# Altium PCB esp32_with_usbc_1st'one.PcbDoc (part 1 of 2)
Units mil, origin at the board's own origin, x right, y up, seen from the top; angles counter-clockwise.
Board outline 2850 x 1000 mil, 4 copper layers (L1, L2, L3, L4), stack 61.583 mil thick; 64 components, 73 nets, 299 pads, 171 vias.
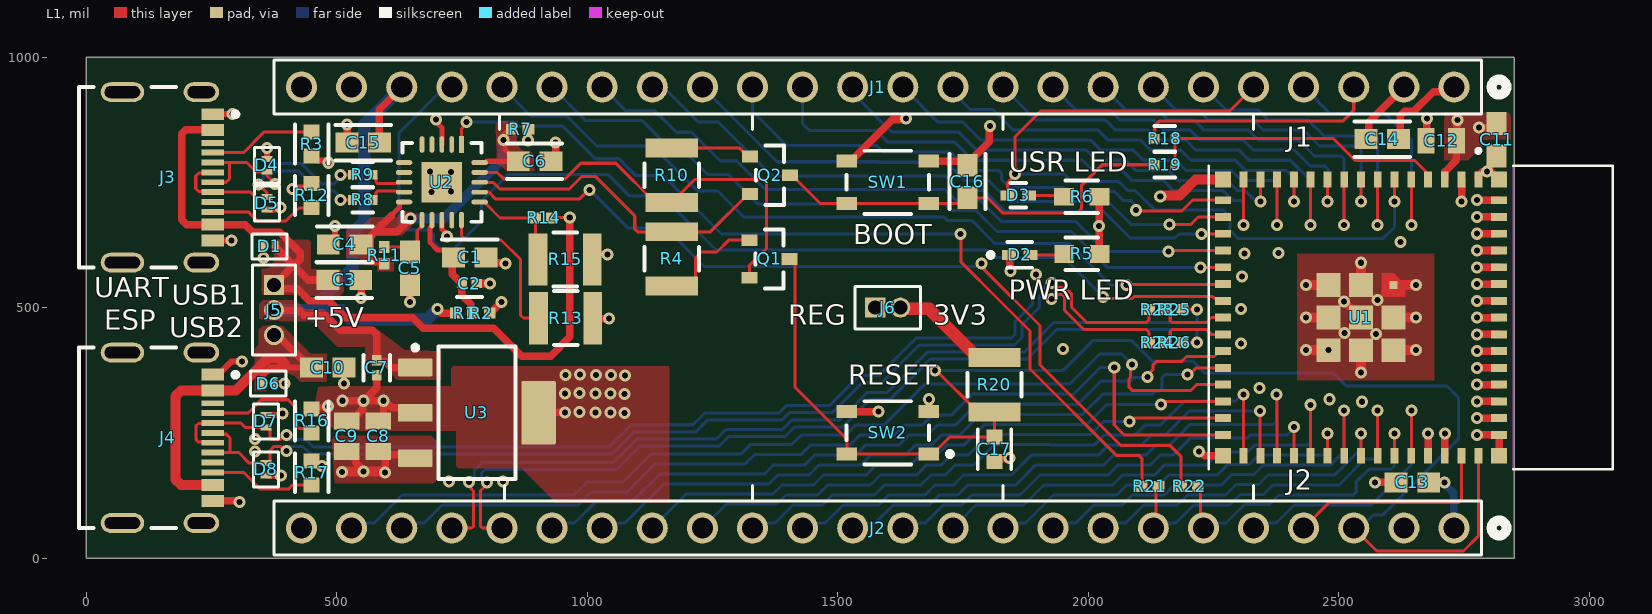
[diagram p0: L1 view]
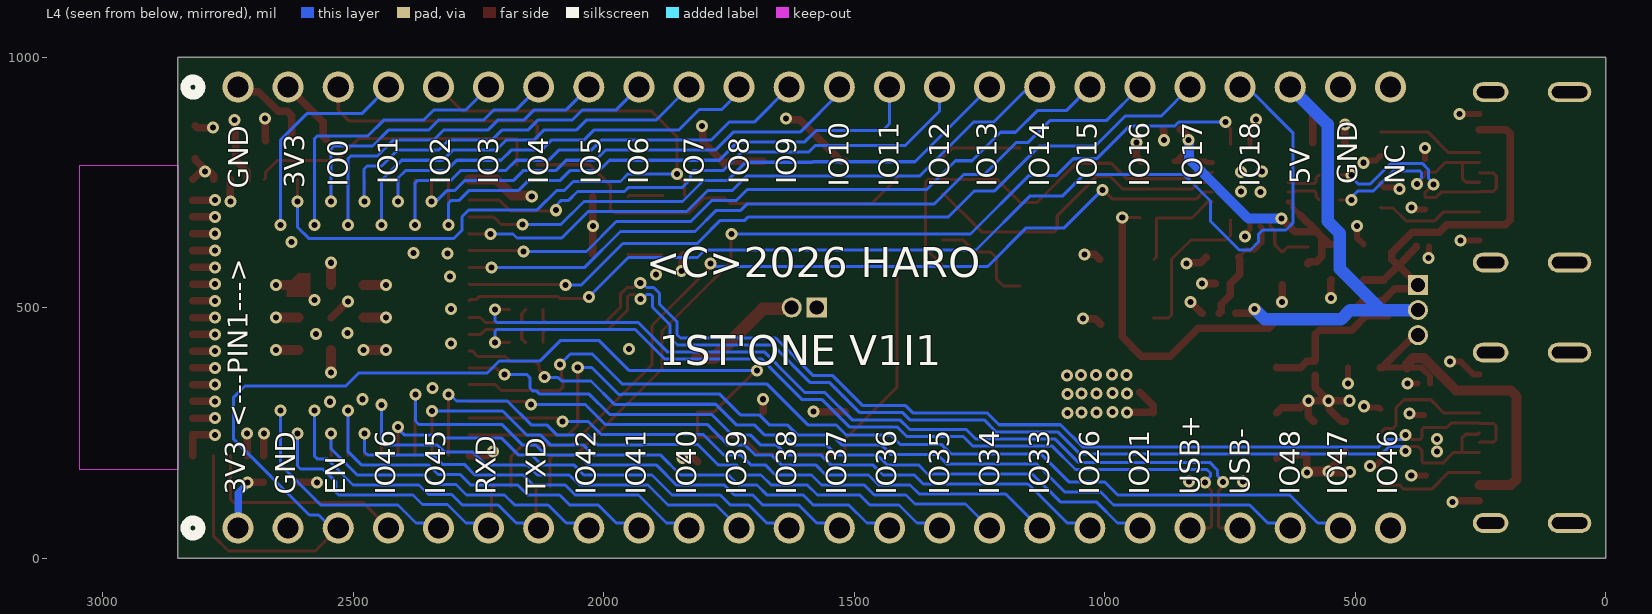
[diagram p1: L4 view, seen from below]
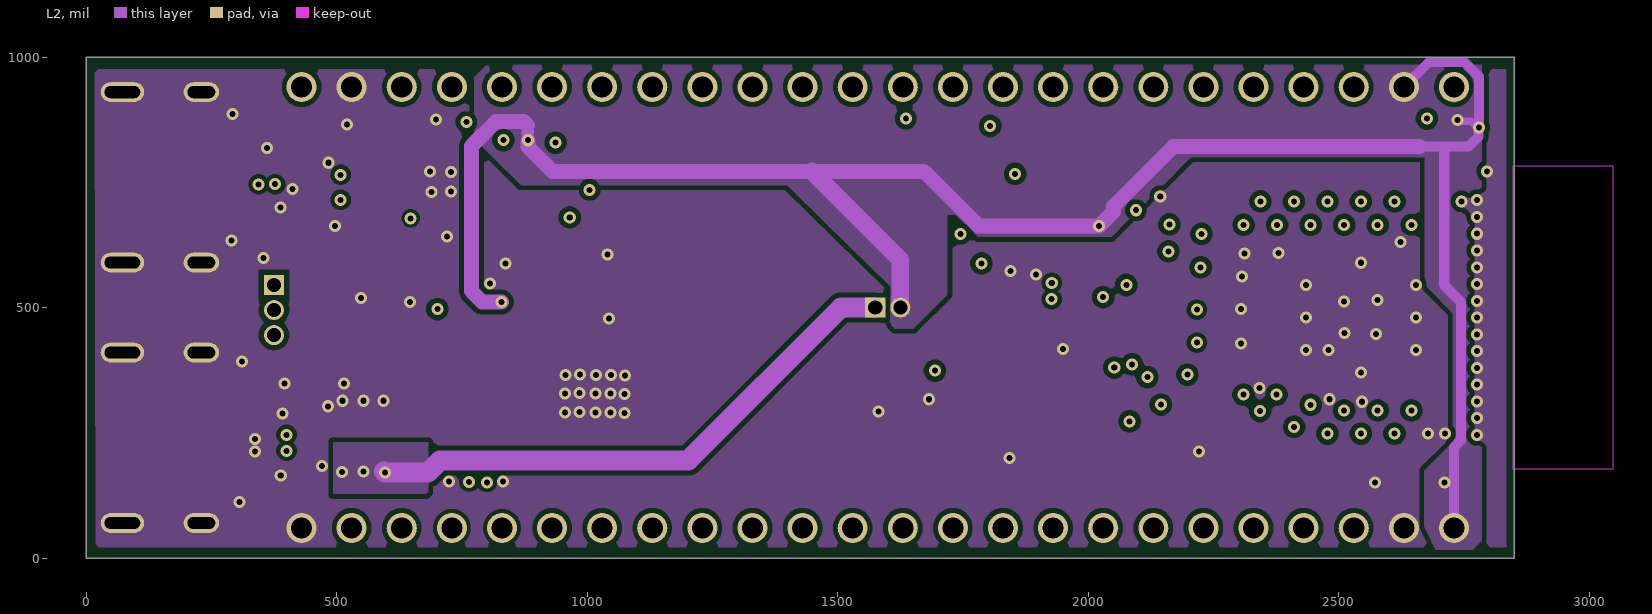
[diagram p2: L2]
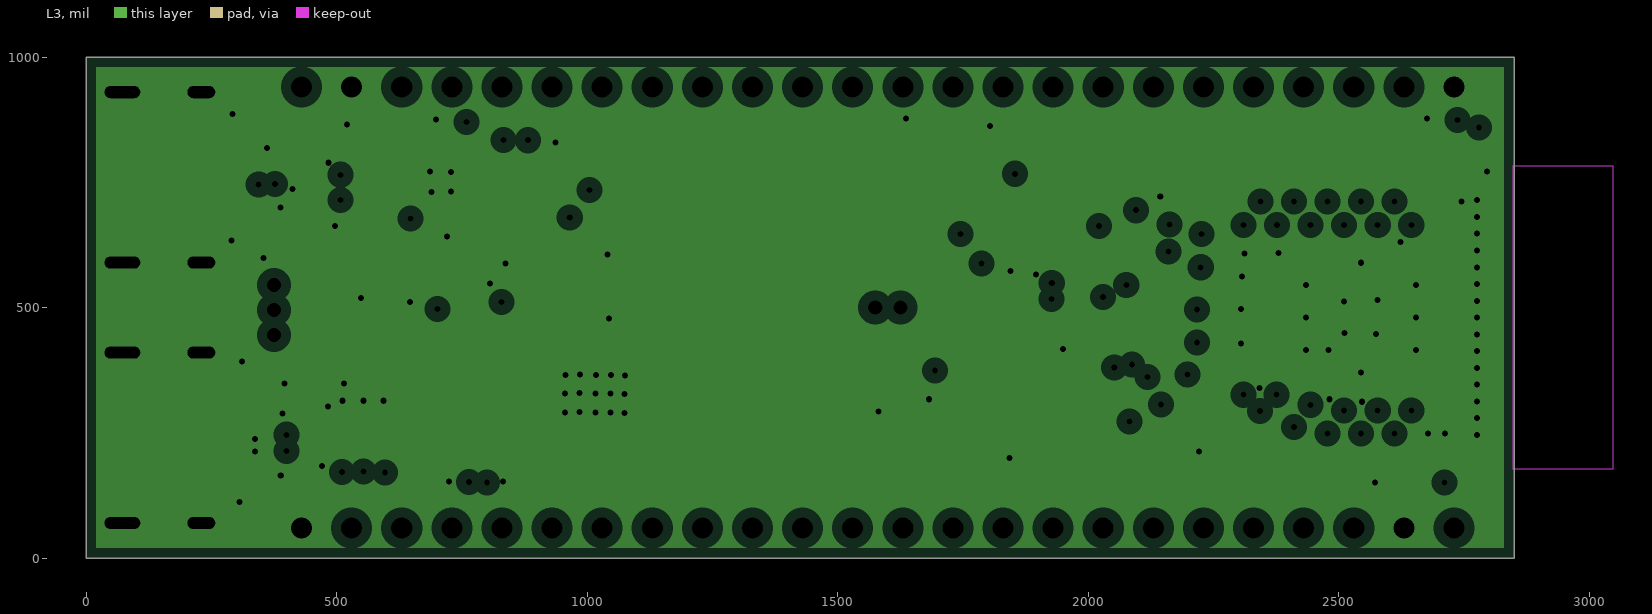
[diagram p3: L3, clearances drawn from the general rule]
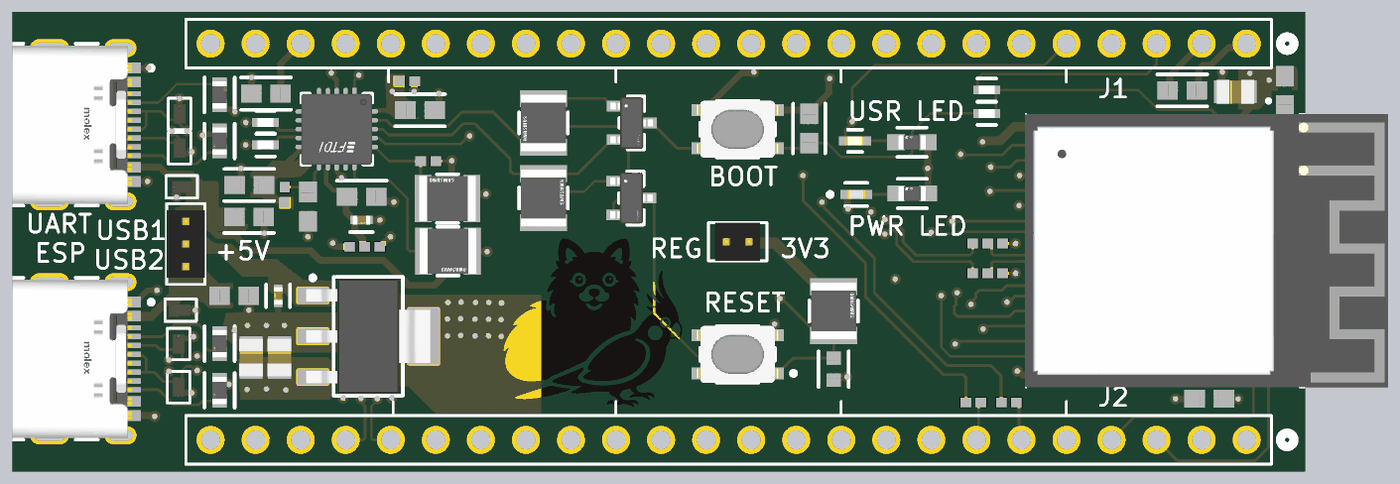
[diagram p5: 3D render of the assembled board from above, using the file's embedded part models]

## Layer stack, top to bottom
Top Solder: solder mask 0.4, Solder Resist, Dk 3.5
L1: signal copper 1.378
Dielectric 2: prepreg 3.9134, PP-006, Dk 4.1
L2: signal copper 0.5984
Dielectric 1: dielectric 49.8031, FR-4, Dk 4.8
L3: plane copper 0.5984, net GND
Dielectric 3: prepreg 3.9134, PP-006, Dk 4.1
L4: signal copper 1.378
Bottom Solder: solder mask 0.4, Solder Resist, Dk 3.5

## Board outline
0,0 2850,0 2850,1000 0,1000

## Design rules (kind name [scope] priority, off if disabled: settings)
Clearance SMALLER [WithinRoom('FTDI') or WithinRoom('USBC2') or WithinRoom('USBC1')] p1: gap=6 ignorepadtopadclearanceinfootprint=FALSE
Clearance "DIFF90 Clearance" [InDifferentialPairClass('DIFF90')] p2: gap=8 ignorepadtopadclearanceinfootprint=FALSE
Clearance [All] p3: gap=10 ignorepadtopadclearanceinfootprint=FALSE except(6: SMDPad-SMDPad)
ComponentClearance R24R26 [InComponent('R24') vs InComponent('R26')] p1: gap=-1 collisioncheckmode=3 verticalgap=-1 showdistances=FALSE
ComponentClearance R23R25 [InComponent('R23') vs InComponent('R25')] p2: gap=-1 collisioncheckmode=3 verticalgap=-1 showdistances=FALSE
ComponentClearance R1R2 [InComponent('R1') vs InComponent('R2')] p3: gap=-1 collisioncheckmode=3 verticalgap=-1 showdistances=FALSE
ComponentClearance [All] p4: gap=10 collisioncheckmode=3 verticalgap=10 showdistances=FALSE
DiffPairsRouting DIFF90 [InDifferentialPairClass('DIFF90')] p1: maxlimit=8.1 minlimit=8 mostfreqgap=8 toplayer_minwidth=6.03 toplayer_maxwidth=6.23 toplayer_prefwidth=6.03 midlayer1_minwidth=5.1 midlayer1_maxwidth=5.2 midlayer1_prefwidth=5.1 bottomlayer_minwidth=6.03 bottomlayer_maxwidth=6.23 bottomlayer_prefwidth=6.03 maxuncoupledlength=500
MinimumSolderMaskSliver [All] p1: minsoldermaskwidth=3.5
PlaneClearance [All] p1: clearance=20
PlaneConnect [All] p1: pad.planeconnectstyle=Relief pad.reliefexpansion=20 pad.reliefentries=4 pad.reliefconductorwidth=20 pad.reliefairgap=10 via.planeconnectstyle=Direct via.reliefexpansion=20 via.reliefentries=4 via.reliefconductorwidth=10 via.reliefairgap=10
PolygonConnect [All] p1: connectstyle=Direct reliefconductorwidth=10 reliefentries=4 polygonreliefangle="90 Angle" airgapwidth=10
RoomDefinition USBC2 [False] p1: confinementstyle=ConfineIn formatcopy=TRUE lockcomponents=FALSE outline 194,384 297,384 297,99 194,99
RoomDefinition USBC1 [False] p2: confinementstyle=ConfineIn formatcopy=TRUE lockcomponents=FALSE outline 188,907 311,907 311,611 188,611
RoomDefinition FTDI [False] p3: confinementstyle=ConfineIn formatcopy=TRUE lockcomponents=FALSE outline 601,864 821,864 821,646 601,646
RoutingVias [All] p1: holewidth=12 width=24 viastyle="Through Hole" minholewidth=12 minwidth=24 maxholewidth=12 maxwidth=24
SilkToSolderMaskClearance [IsPad] p1: minsilkscreentomaskgap=6 clearancetoexposedcopper=TRUE
SolderMaskExpansion [All] p1: expansion=2 istentingtop=FALSE
SupplyNets "Schematic Supply Nets_5" [InNet('+5V')] p1: voltage=0.000
SupplyNets "Schematic Supply Nets_4" [InNet('VCC_3V3')] p2: voltage=0.000
SupplyNets "Schematic Supply Nets_3" [InNet('+5V_VBUS1')] p3: voltage=0.000
SupplyNets "Schematic Supply Nets_2" [InNet('+3V3_REG')] p4: voltage=0.000
SupplyNets "Schematic Supply Nets_1" [InNet('+5V_VBUS2')] p5: voltage=0.000
SupplyNets "Schematic Supply Nets" [InNet('GND')] p6: voltage=0.000
Width [All] p1: maxlimit=100 minlimit=6 preferedwidth=10 minimp=50.000000 maximp=50.000000 favimp=50.000000
24 further rules are at their usual default settings.

## Classes and differential pairs
differential pair class DIFF90: CON1_USB CON2_USB CON_ESP_USB ESP_USB FTDI_USB
net class DIFF90: CON1_USB_N CON1_USB_P CON2_USB_N CON2_USB_P CON_ESP_USB_N CON_ESP_USB_P ESP_USB_N ESP_USB_P FTDI_USB_N FTDI_USB_P
differential pair FTDI_USB: +FTDI_USB_P -FTDI_USB_N
differential pair ESP_USB: +ESP_USB_P -ESP_USB_N
differential pair CON_ESP_USB: +CON_ESP_USB_P -CON_ESP_USB_N
differential pair CON2_USB: +CON2_USB_P -CON2_USB_N
differential pair CON1_USB: +CON1_USB_P -CON1_USB_N

## Components (designator, comment, footprint, x,y, rotation, side; value= is the part's Value field where it differs from the comment)
C1 "100nf 50V" FP-CL10-IPC_A 765.56,600 r0 top
C2 "4.7uF 16V" FP-CL829-IPC_C 764.9,548 r0 top
C3 "100nf 50V" FP-CL10-IPC_A 515.56,555 r0 top
C4 "100nf 50V" FP-CL10-IPC_A 516,626 r180 top
C5 "100nf 50V" FP-CL10-IPC_A 646,578 r270 top
C6 "100nf 50V" FP-CL10-IPC_A 895,792 r0 top
C7 "4.7uF 16V" FP-CL829-IPC_C 580,379.9 r270 top
C8 "CL21B106KAYQNNE" CAP_CL21B106KAYQNNE_SAM-L 583,243 r270 top value=10µF
C9 "CL21B106KAYQNNE" CAP_CL21B106KAYQNNE_SAM-L 520,243 r270 top value=10µF
C10 "100nf 50V" FP-CL10-IPC_A 482.44,380 r0 top
C11 "100nf 50V" FP-CL10-IPC_A 2815,835 r270 top
C12 "CL21B106KAYQNNE" CAP_CL21B106KAYQNNE_SAM-L 2705,833 r0 top value=10µF
C13 "100nf 50V" FP-CL10-IPC_A 2647,151 r180 top
C14 "100nf 50V" FP-CL10-IPC_A 2587,836 r0 top
C15 "100nf 50V" FP-CL10-IPC_A 553,829 r180 top
C16 "100nf 50V" FP-CL10-IPC_A 1759,751.56 r90 top
C17 "1uF/16V(10%)" FP-CL10-IPC_C 1813,217 r270 top
D1 "TVS DIODE 12VC 3A" RTVS_SOD882_LTF 366,622 r0 top
D2 "LED GREEN" FP-SML-LX0402SUGC-TR-MFG 1863.35,605 r0 top
D3 "SML-LX0402SOC-TR" FP-SML-LX0402SOC-TR-MFG 1860.65,724 r0 top
D4 "TVS DIODE 12VC 3A" RTVS_SOD882_LTF 361,784 r270 top
D5 "TVS DIODE 12VC 3A" RTVS_SOD882_LTF 361,708 r90 top
D6 "TVS DIODE 12VC 3A" RTVS_SOD882_LTF 363.5,348 r180 top
D7 "TVS DIODE 12VC 3A" RTVS_SOD882_LTF 359,273 r270 top
D8 "TVS DIODE 12VC 3A" RTVS_SOD882_LTF 359,177 r90 top
J1 "900-0022284245-ND" CONN_SD-42375-001_M295_24_MOL 2730,940 r0 top locked
J2 "900-0022284245-ND" CONN_SD-42375-001_M295_24_MOL 2730,60 r0 top locked
J3 "217179-0001" FP-2171790001-MFG 117.8,759.92 r270 top locked
J4 "217179-0001" FP-2171790001-MFG 117.8,240.08 r270 top locked
J5 "Pin Header, Board-to-Board" HDR_1x3_1.27mm 375,545 r0 top locked
J6 "Samtec FTS-102-01-F-S" HDR_1x2_1.27mm 1575,500 r90 top locked
Q1 "SS8050-G" FP-SS8050-G-MFG 1364,597 r0 top
Q2 "SS8050-G" FP-SS8050-G-MFG 1365,764 r0 top
R1 "jumper 0R" RESC1005X40X25NL05T10 755.27,489 r0 top
R2 "jumper 0R" RESC1005X40X25NL05T10 788.73,489 r180 top
R3 "5.1kΩ, 1%" FP-TFCR0603-IPC_C 450,826.3 r270 top
R4 "10K(1%)" FP-RC3225-IPC_C 1169,597 r90 top
R5 "1KR" FP-CPF0603-MFG 1987.57,607 r0 top value=1.0KΩ
R6 "1KR" FP-CPF0603-MFG 1987,721 r0 top value=1.0KΩ
R7 "jumper 0R" RESC1005X40X25NL05T10 866.27,856 r180 top
R8 "27Ω 0.0625W 1% 100ppm/°" FP-CR0402-MFG 552,715 r0 top
R9 "27Ω 0.0625W 1% 100ppm/°" FP-CR0402-MFG 552,765 r0 top
R10 "10K(1%)" FP-RC3225-IPC_C 1169,764 r270 top
R11 "jumper 0R" RESC1005X40X25NL05T10 595,604.27 r90 top
R12 "5.1kΩ, 1%" FP-TFCR0603-IPC_C 450,723.7 r90 top
R13 "10K(1%)" FP-RC3225-IPC_C 957,479 r0 top
R14 "4.7K" RESC1005X40X25NL05T10 913.28,678.86 r0 top
R15 "10K(1%)" FP-RC3225-IPC_C 956,596 r180 top
R16 "5.1kΩ, 1%" FP-TFCR0603-IPC_C 450,273.7 r90 top
R17 "5.1kΩ, 1%" FP-TFCR0603-IPC_C 450,170 r90 top
R18 "27Ω 0.0625W 1% 100ppm/°" FP-CR0402-MFG 2153,837 r0 top
R19 "27Ω 0.0625W 1% 100ppm/°" FP-CR0402-MFG 2153,785 r0 top
R20 "10K(1%)" FP-RC3225-IPC_C 1813,346 r90 top
R21 "jumper 0R" RESC1005X40X25NL05T10 2123.27,143 r180 top
R22 "jumper 0R" RESC1005X40X25NL05T10 2202,143 r180 top
R23 "jumper 0R" RESC1005X40X25NL05T10 2138.27,496 r0 top
R24 "jumper 0R" RESC1005X40X25NL05T10 2138.27,430 r0 top
R25 "jumper 0R" RESC1005X40X25NL05T10 2171.73,496 r180 top
R26 "jumper 0R" RESC1005X40X25NL05T10 2171.73,430 r180 top
SW1 "SWITCH TACTILE SPST-NO 0.05A 16V" FP-PTS810SJM250SMTRLFS-MFG 1600,750 r180 top locked
SW2 "SWITCH TACTILE SPST-NO 0.05A 16V" FP-PTS810SJM250SMTRLFS-MFG 1600,250 r180 top locked
U1 "ESP32-S3-MINI-1-N8" XCVR_ESP32-S3-MINI-1-N8 2544.41,480 r270 top locked
U2 "FT231XQ-R" FP-QFN-20-IPC_B 710,750 r270 top locked
U3 "TL1963A-33DCYR" DCY0004A_N 780,290 r0 top locked

## Footprints (in the part's own frame and the unit in brackets; to place one, negate y for a bottom-side part, rotate by r counter-clockwise, add the part's x,y. Pads: shape width x height; smd on the part's side, far side on the other; paste and mask are expansions set on the pad)
CAP_CL21B106KAYQNNE_SAM-L [mil]
  rect 33.91x51.03 smd paste+0 mask+0: 1(-30.45,0) 2(30.45,0)
  body extent -41,-26 41,26, height 30
CONN_SD-42375-001_M295_24_MOL [mil]
  round 62 / inner round 60 / far side round 62 hole 42 paste-99999 mask+0: 1(0,0) 2(-100,0) 3(-200,0) 4(-300,0) 5(-400,0) 6(-500,0) 7(-600,0) 8(-700,0) 9(-800,0) 10(-900,0) 11(-1000,0) 12(-1100,0) 13(-1200,0) 14(-1300,0) 15(-1400,0) 16(-1500,0) 17(-1600,0) 18(-1700,0) 19(-1800,0) 20(-1900,0) 21(-2000,0) 22(-2100,0) 23(-2200,0) 24(-2300,0)
  silkscreen extent -2355,-54 105,54
DCY0004A_N [mm] "SOT223, 4-Leads, Body 6.7x3.7mm, Pitch 2.3mm, IPC Medium Density"
  rrect11% 1.75x0.9 smd: 1(-3.125,2.3) 2(-3.125,0) 3(-3.125,-2.3)
  rrect6% 1.75x3.2 smd: 4(3.125,0)
  silkscreen extent -3.25,-3.35 1.95,3.42, body extent -3.5,-3.25 3.5,3.25, height 1.62
FP-2171790001-MFG [mm]
  rrect100% 1x1.8 hole 1.4 slot 0.6 at 0 deg paste-2539.97 mask+0: 1(-4.32,2.85) 2(4.32,2.85)
  rrect100% 1x2.2 hole 1.8 slot 0.6 at 0 deg paste-2539.97 mask+0: 3(-4.32,-1.15) 4(4.32,-1.15)
  rect 0.6x1.15 smd paste+0 mask+0: A1-B12(-3.2,3.425) A4-B9(-2.4,3.425) B1-A12(3.2,3.425) B4-A9(2.4,3.425)
  rect 0.3x1.15 smd paste+0 mask+0: A5(-1.25,3.425) A6(-0.25,3.425) A7(0.25,3.425) A8(1.25,3.425) B5(1.75,3.425) B6(0.75,3.425) B7(-0.75,3.425) B8(-1.75,3.425)
  silkscreen extent -4.57,-3.35 4.57,4.7, body extent -4.92,-3.45 4.92,4.1, height 0.25
FP-CL10-IPC_A [mil]
  rect 45.6x39.85 smd paste+0 mask+0: 1(-32.56,0) 2(32.56,0)
  silkscreen extent -55,36 55,36, body extent -75,-40 75,40, height 10
FP-CL10-IPC_C [mil]
  rect 29.85x31.97 smd paste+0 mask+0: 1(-24.68,0) 2(24.68,0)
  silkscreen extent -40,-33 40,33, body extent -44,-22 44,22, height 10
FP-CL829-IPC_C [mil]
  rect 20.29x18.6 smd paste+0 mask+0: 1(-14.9,0) 2(14.9,0)
  silkscreen extent -25,-27 25,-27, body extent -29,-15 29,15, height 10
FP-CPF0603-MFG [mm]
  rect 1x0.9 smd paste+0 mask+0: 1(-0.9,0) 2(0.9,0)
  silkscreen extent -0.82,-0.82 0.82,0.82, body extent -1.5,-0.55 1.5,0.55, height 0.25
FP-CR0402-MFG [mm]
  rect 0.475x0.5 smd paste+0 mask+0: 1(-0.512,0) 2(0.513,0)
  silkscreen extent -0.53,-0.65 0.53,0.65, body extent -0.85,-0.38 0.85,0.38, height 0.25
FP-PTS810SJM250SMTRLFS-MFG [mm]
  rect 1.05x0.65 smd paste+0 mask+0: 1(-2.075,1.075) 2(2.075,1.075) 3(-2.075,-1.075) 4(2.075,-1.075)
  silkscreen extent -2.1,-1.6 2.1,1.6, body extent -2.7,-1.7 2.7,1.7, height 0.25
FP-QFN-20-IPC_B [mm]
  rect 0.84x0.242 smd paste+0 mask+0: 1(-1.916,1)
  rrect100% 0.84x0.242 smd paste+0 mask+0: 2(-1.916,0.5) 3(-1.916,0) 4(-1.916,-0.5) 5(-1.916,-1) 11(1.916,-1) 12(1.916,-0.5) 13(1.916,0) 14(1.916,0.5) 15(1.916,1)
  rrect100% 0.242x0.84 smd paste+0 mask+0: 6(-1,-1.916) 7(-0.5,-1.916) 8(0,-1.916) 9(0.5,-1.916) 10(1,-1.916) 16(1,1.916) 17(0.5,1.916) 18(0,1.916) 19(-0.5,1.916) 20(-1,1.916)
  rect 2.05x2.05 smd paste-1000 mask+0: 21(0,0)
  silkscreen extent -2,-2 2,2, body extent -2.59,-2.59 2.59,2.59, height 0.25
FP-RC3225-IPC_C [mil]
  rect 37.59x104.57 smd paste+0 mask+0: 1(-54.16,0) 2(54.16,0)
  silkscreen extent -24,-54 24,54, body extent -77,-58 77,58, height 10
FP-SML-LX0402SOC-TR-MFG [mm]
  rect 0.7x0.5 smd paste+0 mask+0: 1(-0.55,0) 2(0.55,0)
  silkscreen extent -0.4,-0.63 0.4,0.63, body extent -1,-0.48 1,0.48, height 0.25
FP-SML-LX0402SUGC-TR-MFG [mm]
  rect 0.7x0.5 smd paste+0 mask+0: 1(-0.55,0) 2(0.55,0)
  silkscreen extent -1.6,-0.65 0.63,0.65, body extent -1,-0.48 1,0.48, height 0.25
FP-SS8050-G-MFG [mm]
  rect 0.8x0.6 smd paste+0 mask+0: 1(-1.01,0.95) 2(-1.01,-0.95) 3(1.01,0)
  silkscreen extent -0.7,-1.5 0.7,1.5, body extent -1.51,-1.6 1.51,1.6, height 0.25
FP-TFCR0603-IPC_C [mil]
  rect 29.85x31.97 smd paste+0 mask+0: 1(-23.7,0) 2(23.7,0)
  silkscreen extent -39,-33 39,33, body extent -43,-22 43,22, height 10
HDR_1x2_1.27mm [mil]
  rect 40x40 hole 28: 1(0,0)
  round 40 hole 28: 2(0,-50)
  silkscreen extent -42,-90 43,40, body extent -42,-75 43,25, height 155
HDR_1x3_1.27mm [mil]
  rect 40x40 hole 28: 1(0,0)
  round 40 hole 28: 2(0,-50) 3(0,-100)
  silkscreen extent -42,-140 42,40, body extent -42,-125 42,25, height 155
RESC1005X40X25NL05T10 [mm] "Chip Resistor, 2-Leads, Body 1.00x0.50mm, IPC Medium Density"
  rect 0.6x0.55 smd: 1(-0.425,0) 2(0.425,0)
  body extent -0.53,-0.27 0.53,0.28, height 0.4
RTVS_SOD882_LTF [mil]
  rect 12x22 smd paste+0 mask+0: 1(-12.5,0) 2(12.5,0)
  silkscreen extent -35,-25 35,25, body extent -21,-13 21,13, height 22
XCVR_ESP32-S3-MINI-1-N8 [mm]
  rect 0.8x0.4 smd: 1(-7,5.95) 2(-7,5.1) 3(-7,4.25) 4(-7,3.4) 5(-7,2.55) 6(-7,1.7) 7(-7,0.85) 8(-7,0) 9(-7,-0.85) 10(-7,-1.7) 11(-7,-2.55) 12(-7,-3.4) 13(-7,-4.25) 14(-7,-5.1) 15(-7,-5.95) 31(7,-5.95) 32(7,-5.1) 33(7,-4.25) 34(7,-3.4) 35(7,-2.55) 36(7,-1.7) 37(7,-0.85) 38(7,0) 39(7,0.85) 40(7,1.7) 41(7,2.55) 42(7,3.4) 43(7,4.25) 44(7,5.1) 45(7,5.95)
  rect 0.4x0.8 smd: 16(-5.95,-7) 17(-5.1,-7) 18(-4.25,-7) 19(-3.4,-7) 20(-2.55,-7) 21(-1.7,-7) 22(-0.85,-7) 23(0,-7) 24(0.85,-7) 25(1.7,-7) 26(2.55,-7) 27(3.4,-7) 28(4.25,-7) 29(5.1,-7) 30(5.95,-7) 46(5.95,7) 47(5.1,7) 48(4.25,7) 49(3.4,7) 50(2.55,7) 51(1.7,7) 52(0.85,7) 53(0,7) 54(-0.85,7) 55(-1.7,7) 56(-2.55,7) 57(-3.4,7) 58(-4.25,7) 59(-5.1,7) 60(-5.95,7)
  rect 1.2x1.2 smd: 61(0,0) 67(0,1.65) 68(1.65,1.65) 69(-1.65,0) 70(1.65,0) 71(-1.65,-1.65) 72(0,-1.65) 73(1.65,-1.65)
  rect 0.8x0.8 smd: 62(-7,7) 63(-7,-7) 64(7,-7) 65(7,7)
  rect 0.4x0.4 smd paste-1 mask+0: 66(-1.65,1.65)
  L1 region: -1.05,1.05 -2.25,1.05 -2.25,1.65 -1.65,2.25 -1.05,2.25
  Keep-Out Layer region: 7.7,7.725 -7.7,7.725 -7.7,12.775 7.7,12.775
  Keep-Out Layer region: 7.7,7.725 -7.7,7.725 -7.7,12.775 7.7,12.775
  silkscreen extent -8.55,-7.73 7.7,12.78, body extent -7.7,-7.8 7.7,12.7, height 2.56

## Part data
C1 C3 C4 C5 C6 C10 C11 C13 C14 C15 C16: library part CMP-13271-002353-1, "Cap Ceramic 100nF 50V X7R ±10% Pad SMD 0603 +125°C T/R", Capacitance=100nF, Case Code (Imperial)=0603, Case Code (Metric)=1608, Max Operating Temperature=125°C, Min Operating Temperature=-55°C, Ratings=AEC-Q200, Tolerance=10%, Voltage Rating=50V, Case/Package=0603, Features="Soft Termination", Lead Free="Lead Free", Length=0.063inch, Mount="Surface Mount", Packaging="Tape and Reel", Thickness=0.035inch, Width=0.031inch
C2 C7: library part CMP-13271-001468-1, "Cap Ceramic 4.7uF 16V X5R ±20% SMD 0402 +85°C Paper T/R", Capacitance=4.7uF, Case Code (Imperial)=0402, Case Code (Metric)=1005, Max Operating Temperature=85°C, Min Operating Temperature=-55°C, Tolerance=20%, Voltage Rating=16V, Case/Package=0402, Length=0.039inch, Mount="Surface Mount", Packaging="Tape and Reel", Thickness=0.022inch, Width=0.02inch
C8 C9 C12: "25V 10uF X7R 卤10% 0805 Multilayer Ceramic Capacitors MLCC - SMD/SMT ROHS", Case/Package=0805, Dielectric Material=Ceramic, Manufacturer="Samsung Electro-Mechanics", Max Operating Temperature=125°C, Min Operating Temperature=-55°C, Tolerance=10%, Voltage Rating=25V, Category="Ceramic Capacitors", China RoHS=Compliant, ComponentLink1Description=https://datasheet.octopart.com:443/CL21B106KAYQNNE-Samsung-Electro-Mechanics-datasheet-181551887.pdf?src-supplier=Newark, ComponentLink1URL=https://datasheet.octopart.com:443/CL21B106KAYQNNE-Samsung-Electro-Mechanics-datasheet-181551887.pdf?src-supplier=Newark, ComponentLink2Description=https://datasheet.octopart.com:443/CL21B106KAYQNNE-Samsung-Electro-Mechanics-datasheet-149045937.pdf?src-supplier=Future+Electronics, ComponentLink2URL=https://datasheet.octopart.com:443/CL21B106KAYQNNE-Samsung-Electro-Mechanics-datasheet-149045937.pdf?src-supplier=Future+Electronics, Country of Origin="Mainland China, Philippines, South Korea", Export Control Classification Number (ECCN) Code=EAR99, Harmonized Tariff Schedule (HTS) Code=8532.24.00.20, Height=1.45mm, Introduction Date=2017-09-12, Lifecycle Status=Production, Manufacturer Part Number=CL21B106KAYQNNE, Material=Ceramic, Mounting Technology="Surface Mount", Number of Terminals=2, Pricing="5=0.359, 25=0.214, 100=0.142, 250=0.128, 500=0.114, 1000=0.105, 2500=0.103, 5000=0.101 (USD)", REACH SVHC=Yes, RoHS=Compliant, Supplier=Newark, Supplier Part Number=CL21B106KAYQNNE, Voltage Rating (DC)=25V
C17: library part CMP-13271-002188-1, "Cap Ceramic 1uF 16V X7R ±10% Pad SMD 0603 +125°C T/R", Capacitance=1uF, Case Code (Imperial)=0603, Case Code (Metric)=1608, Dielectric=X7R, Max Operating Temperature=125°C, Min Operating Temperature=-55°C, Ratings=AEC-Q200, Tolerance=10%, Voltage Rating=16V, Case/Package=0603, Depth=0.8mm, Features="Soft Termination", Lead Free="Lead Free", Length=0.063inch, Mount="Surface Mount", Packaging="Tape and Reel", Thickness=0.035inch, Width=0.031inch
D1 D4 D5 D6 D7 D8: library part AQ3045-01ETG, "TVS DIODE 12VC 3A SOD882 / ESD Suppressor TVS Bi-Dir 5.3V Automotive 2-Pin SOD-882 T/R", Breakdown Voltage=7.8V, Clamping Voltage=12V, LCSC part number=C3710326, Leakage Current=100nA, Manufacturer=Littelfuse, Max Breakdown Voltage=9V, Max Operating Temperature=150°C, Min Breakdown Voltage=6.8V, Min Operating Temperature=-40°C, Operating Supply Voltage=5.3V, Peak Pulse Power=40W, Ratings=AEC-Q101, Supplier Part Number=F9321CT-ND, Category="TVS Diodes", ComponentLink1Description=https://datasheet.octopart.com:443/AQ3045-01ETG-Littelfuse-datasheet-180606588.pdf?src-supplier=IHS, ComponentLink1URL=https://datasheet.octopart.com:443/AQ3045-01ETG-Littelfuse-datasheet-180606588.pdf?src-supplier=IHS, ComponentLink2Description=https://datasheet.octopart.com:443/AQ3045-01ETG-Littelfuse-datasheet-140480283.pdf?src-supplier=ODG+(Origin+Data+Global), ComponentLink2URL=https://datasheet.octopart.com:443/AQ3045-01ETG-Littelfuse-datasheet-140480283.pdf?src-supplier=ODG+(Origin+Data+Global), ComponentLink3Description=https://datasheet.octopart.com:443/AQ3045-01ETG-Littelfuse-datasheet-101609968.pdf?src-supplier=Farnell, ComponentLink3URL=https://datasheet.octopart.com:443/AQ3045-01ETG-Littelfuse-datasheet-101609968.pdf?src-supplier=Farnell, ComponentLink4Description=https://datasheet.octopart.com:443/AQ3045-01ETG-Littelfuse-datasheet-183003566.pdf?src-supplier=JRH+Electronics, ComponentLink4URL=https://datasheet.octopart.com:443/AQ3045-01ETG-Littelfuse-datasheet-183003566.pdf?src-supplier=JRH+Electronics, ComponentLink5Description=https://datasheet.octopart.com:443/AQ3045-01ETG-Littelfuse-datasheet-170904929.pdf?src-supplier=Future+Electronics, ComponentLink5URL=https://datasheet.octopart.com:443/AQ3045-01ETG-Littelfuse-datasheet-170904929.pdf?src-supplier=Future+Electronics, Lifecycle Status=Production, Manufacturer Part Number=AQ3045-01ETG, Mounting Technology="Surface Mount", Number of Channels=1, Number of Elements=1, Number of Terminals=2, Packaging="Cut Tape", Peak Reverse Current=100nA, Polarity=Bidirectional, Pricing="1=0.71, 10=0.44, 50=0.3204, 100=0.2817, 500=0.21354 (USD)", REACH SVHC=Yes, Reverse Standoff Voltage=5.3V, RoHS=Compliant, Stock=87918, Supplier=DigiKey
D2: library part CMP-57192-000001-1, "LED GREEN CLEAR SMD", Case Code (Imperial)=0402, Case Code (Metric)=1005, Color=Green, Forward Current=20mA, Forward Voltage=2.2V, Lens Color=Colorless, Max Operating Temperature=85°C, Min Operating Temperature=-40°C, Package Quantity=1, Approvals=UL, Case/Package=0402, Dominant Wavelength=574nm, Height=0.5mm, Illumination Color=Green, Lead Free="Lead Free", Length=1mm, Lens Style=Diffused, Lens Transparency=Clear, Luminous Intensity=45mcd, Mount="Surface Mount", Number of LEDs=1, Number of Pins=2, Packaging="Tape and Reel", Test Current=20mA, Viewing Angle=120°, Wavelength=574nm, Width=0.5mm
D3: library part CMP-57192-000002-1, "LED ORANGE CLEAR SMD", Case Code (Imperial)=0402, Case Code (Metric)=1005, Color=Orange, Forward Current=20mA, Forward Voltage=2V, Lens Color=Colorless, Max Operating Temperature=85°C, Min Operating Temperature=-40°C, Package Quantity=1, Case/Package=0402, Height=0.5mm, Illumination Color=Orange, Lead Free="Lead Free", Length=1mm, Lens Style=Clear, Lens Transparency=Clear, Luminous Intensity=120mcd, Mount="Surface Mount", Number of LEDs=1, Number of Pins=2, Packaging="Tape and Reel", Test Current=20mA, Viewing Angle=120°, Wavelength=610nm, Width=0.5mm
J1 J2: library part 22-28-4245, "KK 254 Breakaway Header, Vertical, 24 Circuits, 0.38µm Gold (Au) Plating, Mating Pin Length 7.49mm, Bag", Color=Black, Contact Resistance=10mΩ, Current Rating=4A, Insulation Resistance=1GΩ, LCSC part number=C7145888, Manufacturer=Molex, Manufacturer Lifecycle Status=ACTIVE, Max Operating Temperature=75°C, Min Operating Temperature=-40°C, Operating Force=4.9N, Ratings=CSA, Category="Headers and Wire Housings", China RoHS=Compliant, ComponentLink1Description=https://datasheet.octopart.com:443/22-28-4245-Molex-datasheet-166051265.pdf?src-supplier=IHS, ComponentLink1URL=https://datasheet.octopart.com:443/22-28-4245-Molex-datasheet-166051265.pdf?src-supplier=IHS, ComponentLink2Description=https://datasheet.octopart.com:443/022284245-Molex-datasheet-8337137.pdf?src-supplier=Arrow+Electronics, ComponentLink2URL=https://datasheet.octopart.com:443/022284245-Molex-datasheet-8337137.pdf?src-supplier=Arrow+Electronics, ComponentLink3Description=https://datasheet.octopart.com:443/22-28-4245-Molex-datasheet-16300812.pdf?src-supplier=Molex, ComponentLink3URL=https://datasheet.octopart.com:443/22-28-4245-Molex-datasheet-16300812.pdf?src-supplier=Molex, ComponentLink4Description=https://sigma.octopart.com:443/16300370/technical_drawing/Molex-22-28-4245.pdf?src-supplier=Molex, ComponentLink4URL=https://sigma.octopart.com:443/16300370/technical_drawing/Molex-22-28-4245.pdf?src-supplier=Molex, ComponentLink5Description=https://datasheet.octopart.com:443/22-28-4245-Molex-datasheet-4210.pdf?src-supplier=DigiKey, ComponentLink5URL=https://datasheet.octopart.com:443/22-28-4245-Molex-datasheet-4210.pdf?src-supplier=DigiKey, ComponentLink6Description=http://sigma.octopart.com:80/16300813/rohs_statement/Molex-22-28-4245.pdf?src-supplier=Compliance+Statements, ComponentLink6URL=http://sigma.octopart.com:80/16300813/rohs_statement/Molex-22-28-4245.pdf?src-supplier=Compliance+Statements, ComponentLink7Description=http://sigma.octopart.com:80/reach_statement/Molex-company-74.pdf?src-supplier=Compliance+Statements, ComponentLink7URL=http://sigma.octopart.com:80/reach_statement/Molex-company-74.pdf?src-supplier=Compliance+Statements, ComponentLink8Description=http://sigma.octopart.com:80/rohs_statement/Molex-company-73.pdf?src-supplier=Compliance+Statements, ComponentLink8URL=http://sigma.octopart.com:80/rohs_statement/Molex-company-73.pdf?src-supplier=Compliance+Statements, ComponentLink9Description=http://sigma.octopart.com:80/conflict_mineral_statement/Molex-company-72.pdf?src-supplier=Compliance+Statements, ComponentLink9URL=http://sigma.octopart.com:80/conflict_mineral_statement/Molex-company-72.pdf?src-supplier=Compliance+Statements, Contact Material=Brass, Contact Plating=Gold, Country of Origin=US, Export Control Classification Number (ECCN) Code=EAR99, Gender=Male, Harmonized Tariff Schedule (HTS) Code=8536.69.40.40, Housing Color=Black, Insulation Color=Black, Introduction Date=1994-12-01, Lead Free="Lead Free", Lifecycle Status=Production, Manufacturer Part Number=22-28-4245, Mounting Technology="Through Hole", Number of Circuits=24, Number of Contacts=24, Number of Positions=24, Number of Rows=1, Orientation=Vertical, Packaging=Bulk, Pins=24, Pitch=2.54mm, Plating=Tin, Plating Thickness=381nm, Pricing="1=4.05, 10=3.444, 100=2.9267, 500=2.61254, 1000=2.48792 (USD)", REACH SVHC=Yes, RoHS=Compliant, Schedule B="8536694040, 8536694040|8536694040|8536694040|8536694040|8536694040", Stock=574, Supplier=DigiKey, Supplier Part Number=900-0022284245-ND, Terminal Pitch=2.54mm, Termination=Solder
J3 J4: "USB Connector, 16 Contact(s), Female, Right Angle, Surface Mount Terminal, Locking, Receptacle", Contact Resistance=50mΩ, Current Rating=1.25A, Dielectric Material=Polyamide, Insulation Color=Black, Insulation Resistance=100MΩ, Manufacturer=Molex, Manufacturer Lifecycle Status=ACTIVE, Max Operating Temperature=85°C, Min Operating Temperature=-40°C, Voltage Rating=30V, Category="USB Connectors", China RoHS=Compliant, ComponentLink1Description=https://datasheet.octopart.com:443/217179-0001-Molex-datasheet-158871109.pdf?src-supplier=ODG+(Origin+Data+Global), ComponentLink1URL=https://datasheet.octopart.com:443/217179-0001-Molex-datasheet-158871109.pdf?src-supplier=ODG+(Origin+Data+Global), ComponentLink2Description=https://sigma.octopart.com:443/158871110/technical_drawing/Molex-217179-0001.pdf?src-supplier=Upverter, ComponentLink2URL=https://sigma.octopart.com:443/158871110/technical_drawing/Molex-217179-0001.pdf?src-supplier=Upverter, ComponentLink3Description=https://datasheet.octopart.com:443/217179-0001-Molex-datasheet-164573281.pdf?src-supplier=RS+(Formerly+Allied+Electronics), ComponentLink3URL=https://datasheet.octopart.com:443/217179-0001-Molex-datasheet-164573281.pdf?src-supplier=RS+(Formerly+Allied+Electronics), ComponentLink4Description=http://sigma.octopart.com:80/reach_statement/Molex-company-74.pdf?src-supplier=Compliance+Statements, ComponentLink4URL=http://sigma.octopart.com:80/reach_statement/Molex-company-74.pdf?src-supplier=Compliance+Statements, ComponentLink5Description=http://sigma.octopart.com:80/rohs_statement/Molex-company-73.pdf?src-supplier=Compliance+Statements, ComponentLink5URL=http://sigma.octopart.com:80/rohs_statement/Molex-company-73.pdf?src-supplier=Compliance+Statements, ComponentLink6Description=http://sigma.octopart.com:80/conflict_mineral_statement/Molex-company-72.pdf?src-supplier=Compliance+Statements, ComponentLink6URL=http://sigma.octopart.com:80/conflict_mineral_statement/Molex-company-72.pdf?src-supplier=Compliance+Statements, Contact Material="Gold, Nickel", Country of Origin="Mainland China", Export Control Classification Number (ECCN) Code=EAR99, Gender=Female, Harmonized Tariff Schedule (HTS) Code=8536.69.40.30, Height=3.36mm, Introduction Date=2021-08-30, Lifecycle Status=Production, Manufacturer Part Number=217179-0001, Number of Contacts=16, Number of Ports=1, Number of Positions=16, Number of Rows=1, Orientation="Right Angle", Pricing="7200=0.4445, 21600=0.38415, 43200=0.3822, 86400=0.38025, 201600=0.3783 (USD)", REACH SVHC=Yes, RoHS=Compliant, Shell Finish=Nickel, Shell Material="Stainless Steel", Stock=28800, Supplier=Avnet, Supplier Part Number=217179-0001, Terminal Pitch=500µm, USB Standard="USB 2.0"
J5: library part FTS-103-01-F-S, "Pin Header, Board-to-Board, Wire-to-Board, 3.4 A, 1.27 mm, 1 Rows, 3 Contacts, Through Hole", LCSC part number=C3333578, Manufacturer=Samtec, Manufacturer Lifecycle Status=PRODUCTION, Supplier Part Number=612-FTS-103-01-F-S-ND, Category="Board to Board Connectors", ComponentLink1Description=https://datasheet.octopart.com:443/FTS-103-01-F-S-Samtec-datasheet-97029283.pdf?src-supplier=Newark, ComponentLink1URL=https://datasheet.octopart.com:443/FTS-103-01-F-S-Samtec-datasheet-97029283.pdf?src-supplier=Newark, ComponentLink2Description=https://datasheet.octopart.com:443/FTS-103-01-F-S-Samtec-datasheet-165596534.pdf?src-supplier=Newark, ComponentLink2URL=https://datasheet.octopart.com:443/FTS-103-01-F-S-Samtec-datasheet-165596534.pdf?src-supplier=Newark, ComponentLink3Description=https://sigma.octopart.com:443/97029285/technical_drawing/Samtec-FTS-103-01-F-S.pdf?src-supplier=element14+APAC, ComponentLink3URL=https://sigma.octopart.com:443/97029285/technical_drawing/Samtec-FTS-103-01-F-S.pdf?src-supplier=element14+APAC, ComponentLink4Description=https://datasheet.octopart.com:443/FTS-103-01-F-S-Samtec-datasheet-118493358.pdf?src-supplier=Electro+Sonic, ComponentLink4URL=https://datasheet.octopart.com:443/FTS-103-01-F-S-Samtec-datasheet-118493358.pdf?src-supplier=Electro+Sonic, ComponentLink5Description=https://datasheet.octopart.com:443/FTS-103-01-F-S-Samtec-datasheet-176663378.pdf?src-supplier=Toby+Electronics, ComponentLink5URL=https://datasheet.octopart.com:443/FTS-103-01-F-S-Samtec-datasheet-176663378.pdf?src-supplier=Toby+Electronics, ComponentLink6Description=https://datasheet.octopart.com:443/FTS-103-01-F-S-Samtec-datasheet-116535195.pdf?src-supplier=Toby+Electronics, ComponentLink6URL=https://datasheet.octopart.com:443/FTS-103-01-F-S-Samtec-datasheet-116535195.pdf?src-supplier=Toby+Electronics, ComponentLink7Description=https://datasheet.octopart.com:443/FTS-103-01-F-S-Samtec-datasheet-136395376.pdf?src-supplier=Toby+Electronics, ComponentLink7URL=https://datasheet.octopart.com:443/FTS-103-01-F-S-Samtec-datasheet-136395376.pdf?src-supplier=Toby+Electronics, ComponentLink8Description=https://datasheet.octopart.com:443/FTS-103-01-F-S-Samtec-datasheet-151470456.pdf?src-supplier=Sager+Electronics, ComponentLink8URL=https://datasheet.octopart.com:443/FTS-103-01-F-S-Samtec-datasheet-151470456.pdf?src-supplier=Sager+Electronics, Contact Plating=Gold, Gender=Male, Lifecycle Status=Production, Manufacturer Part Number=FTS-103-01-F-S, Mounting Technology="Through Hole", Number of Contacts=3, Number of Rows=1, Packaging=Bulk, Pitch=1.27mm, Pricing="1=0.73, 50=0.638, 100=0.541, 500=0.449, 1000=0.384, 2000=0.314, 5000=0.30344 (USD)", Radiation Hardening=No, RoHS=Compliant, Stock=3233, Supplier=DigiKey, Termination=Solder
J6: library part FTS-102-01-F-S, "Pin Header, Board-to-Board, 1.27 mm, 1 Rows, 2 Contacts, Through Hole Straight, FTS Series", LCSC part number=C6045317, Manufacturer=Samtec, Manufacturer Lifecycle Status=PRODUCTION, Category="Headers and Wire Housings", ComponentLink1Description=https://datasheet.octopart.com:443/FTS-102-01-F-S-Samtec-datasheet-97029283.pdf?src-supplier=Newark, ComponentLink1URL=https://datasheet.octopart.com:443/FTS-102-01-F-S-Samtec-datasheet-97029283.pdf?src-supplier=Newark, ComponentLink2Description=https://sigma.octopart.com:443/97029285/technical_drawing/Samtec-FTS-102-01-F-S.pdf?src-supplier=Newark, ComponentLink2URL=https://sigma.octopart.com:443/97029285/technical_drawing/Samtec-FTS-102-01-F-S.pdf?src-supplier=Newark, ComponentLink3Description=https://datasheet.octopart.com:443/FTS-102-01-F-S-Samtec-datasheet-118493358.pdf?src-supplier=Electro+Sonic, ComponentLink3URL=https://datasheet.octopart.com:443/FTS-102-01-F-S-Samtec-datasheet-118493358.pdf?src-supplier=Electro+Sonic, ComponentLink4Description=https://datasheet.octopart.com:443/FTS-102-01-F-S-Samtec-datasheet-165596534.pdf?src-supplier=JRH+Electronics, ComponentLink4URL=https://datasheet.octopart.com:443/FTS-102-01-F-S-Samtec-datasheet-165596534.pdf?src-supplier=JRH+Electronics, ComponentLink5Description=https://datasheet.octopart.com:443/FTS-102-01-F-S-Samtec-datasheet-176663378.pdf?src-supplier=Toby+Electronics, ComponentLink5URL=https://datasheet.octopart.com:443/FTS-102-01-F-S-Samtec-datasheet-176663378.pdf?src-supplier=Toby+Electronics, ComponentLink6Description=https://datasheet.octopart.com:443/FTS-102-01-F-S-Samtec-datasheet-116535195.pdf?src-supplier=Toby+Electronics, ComponentLink6URL=https://datasheet.octopart.com:443/FTS-102-01-F-S-Samtec-datasheet-116535195.pdf?src-supplier=Toby+Electronics, ComponentLink7Description=https://datasheet.octopart.com:443/FTS-102-01-F-S-Samtec-datasheet-136395376.pdf?src-supplier=Toby+Electronics, ComponentLink7URL=https://datasheet.octopart.com:443/FTS-102-01-F-S-Samtec-datasheet-136395376.pdf?src-supplier=Toby+Electronics, ComponentLink8Description=https://datasheet.octopart.com:443/FTS-102-01-F-S-Samtec-datasheet-151470456.pdf?src-supplier=Sager+Electronics, ComponentLink8URL=https://datasheet.octopart.com:443/FTS-102-01-F-S-Samtec-datasheet-151470456.pdf?src-supplier=Sager+Electronics, Contact Plating=Gold, Gender=Male, Lifecycle Status=Production, Manufacturer Part Number=FTS-102-01-F-S, Mounting Technology="Through Hole", Number of Contacts=2, Number of Rows=1, Packaging=Bulk, Pitch=1.27mm, Pricing="1=0.487, 50=0.425, 100=0.361, 500=0.299, 1000=0.256, 2000=0.21, 5000=0.166 (USD)", Radiation Hardening=No, RoHS=Compliant, Stock=6785, Supplier="Arrow Electronics", Supplier Part Number=FTS-102-01-F-S, Termination=Solder
Q1 Q2: library part CMP-20235-000001-1, "NPN TRANSISTOR 1.5A 40V SOT-23 R", Case/Package=TO-236-3, Collector Emitter Breakdown Voltage=25V, Collector Emitter Voltage (VCEO)=400mV, Max Collector Current=1.5A, Max Power Dissipation=300mW, Transition Frequency=100MHz, Max Breakdown Voltage=25V, Mount="Surface Mount", Packaging="Tape and Reel", RoHS Compliant=Yes
R1 R2 R7 R11 R21 R22 R23 R24 R25 R26: library part CMP-1011-00001-2, Manufacturer="Yageo / Phycomp", Part Number=RC0402JR-070RL
R3 R12 R16 R17: library part CMP-250906-189493-1, "RES Thin Film,  5.1kΩ, 1%, 0.1W, 25ppm/°C, 0603"
R4 R10 R13 R15 R20: library part CMP-13261-001525-1, "Res Thick Film 1210 10kΩ 1% 0.333W ±100ppm/°C Pad SMD T/R", Case/Package=1210, Power Rating=333mW, Resistance=10kR, Voltage Rating (DC)=200V, Lead Free="Lead Free"
R5 R6: library part CMP-03211-002621-1, "RES SMD 1.0KΩ 1% 1/16W 0603", Manufacturer="TE Connectivity", Manufacturer Part Number=CPF0603F1K0C1, Package=CPF0603, Power Rating=0.063W, Resistance=1.0KΩ, Temperature="-55°C to +155°C", Temperature Coefficient=50ppm/°C, Temperature Range High=+155°C, Temperature Range Low=-55°C, Tolerance=1%, Voltage Rating=50V, Automotive=No, Category=Res, ComponentLink2Description=Datasheet, ComponentLink2URL=https://www.te.com/commerce/DocumentDelivery/DDEController?Action=showdoc&DocId=Data+Sheet%7F1773200%7FM%7Fpdf%7FEnglish%7FENG_DS_1773200_M.pdf%7F3-1676481-2, Composition="Thin Film", Device Class L1="Passive Components", Device Class L2=Resistors, Device Class L3="Chip SMD Resistors", Height=0.55mm, Ipc Land Pattern Name=RESC15580X45, Lead Free=Yes, Octopart=https://octopart.com/cpf0603f1k0c1-te+connectivity-42013134, octopart_url=https://octopart.com/cpf0603f1k0c1-te+connectivity-42013134, Packaging="1k Reel", RoHS=TRUE, Series=CPF
R8 R9 R18 R19: library part CMP-1011-00331-3, "Thick Film Chip Resistors 0402 27Ω 0.0625W 1% 100ppm/°C", Case Code (Imperial)=0402, Case Code (Metric)=1005, Max Operating Temperature=125°C, Max Power Dissipation=63mW, Min Operating Temperature=-55°C, Package Quantity=10000, Power Rating=62.5mW, Resistance=27R, Temperature Coefficient=100ppm/°C, Tolerance=1%, Voltage Rating=50V, Case/Package=0402, Composition="Thick Film", Contact Plating=Tin, Height=0.016inch, Length=0.039inch, Mount="Surface Mount", Number of Terminations=2, Packaging="Tape and Reel", Radiation Hardening=No, Termination=SMD/SMT, Thickness=356um, Width=0.5mm
R14: library part CMP-1011-00586-2, Manufacturer="Yageo / Phycomp", Part Number=RC0402FR-074K7L
SW1 SW2: library part CMP-10040-000001-2, Case/Package=SMD/SMT, Color=Black, Current Rating=50mA, Max Operating Temperature=85°C, Min Operating Temperature=-40°C, Operating Force=160gf, Package Quantity=2900, Voltage Rating (DC)=16V, Actuator Type=Standard, Contact Plating=Silver, Depth=4.6mm, Illumination Type=Non-Illuminated, Lead Free="Lead Free", Length=3.2mm, Max Current Rating=50mA, Mechanical Life=150000Cycles, Mount="Surface Mount", Orientation=Straight, Packaging="Tape and Reel", RoHS Compliant=Yes, Switch Function=Off-Mom, Switch Travel=0.15mm, Termination=J-Bend, Throw Configuration=SPST
U1: "SMD module, ESP32-S3FN8, 8 MB SPI flash, PCB antenna", LCSC part number=C2913206, Manufacturer="Espressif Systems", Category="RF Transceiver Modules and Modems", ComponentLink1Description=https://datasheet.octopart.com:443/ESP32-S3-MINI-1-N8-Espressif-Systems-datasheet-194171672.pdf?src-supplier=LCSC, ComponentLink1URL=https://datasheet.octopart.com:443/ESP32-S3-MINI-1-N8-Espressif-Systems-datasheet-194171672.pdf?src-supplier=LCSC, ComponentLink2Description=https://datasheet.octopart.com:443/ESP32-S3-MINI-1-N8-Espressif-Systems-datasheet-188867343.pdf?src-supplier=TME, ComponentLink2URL=https://datasheet.octopart.com:443/ESP32-S3-MINI-1-N8-Espressif-Systems-datasheet-188867343.pdf?src-supplier=TME, ComponentLink3Description=https://datasheet.octopart.com:443/ESP32-S3-MINI-1-N8-Espressif-Systems-datasheet-165560562.pdf?src-supplier=TME, ComponentLink3URL=https://datasheet.octopart.com:443/ESP32-S3-MINI-1-N8-Espressif-Systems-datasheet-165560562.pdf?src-supplier=TME, ComponentLink4Description=https://datasheet.octopart.com:443/ESP32-S3-MINI-1-N8-Espressif-Systems-datasheet-165560559.pdf?src-supplier=TME, ComponentLink4URL=https://datasheet.octopart.com:443/ESP32-S3-MINI-1-N8-Espressif-Systems-datasheet-165560559.pdf?src-supplier=TME, ComponentLink5Description=https://datasheet.octopart.com:443/ESP32-S3-MINI-1-N8-Espressif-Systems-datasheet-192318068.pdf?src-supplier=HQonline, ComponentLink5URL=https://datasheet.octopart.com:443/ESP32-S3-MINI-1-N8-Espressif-Systems-datasheet-192318068.pdf?src-supplier=HQonline, Manufacturer Part Number=ESP32-S3-MINI-1-N8, Pricing="650=3.22 (USD)", RoHS=Compliant, Stock=18850, Supplier="Future Electronics", Supplier Part Number=ESP32-S3-MINI-1-N8
U2: "IC USB SERIAL FULL UART 20QFN", Case/Package=QFN, LCSC part number=C132159, Max Operating Temperature=85°C, Max Supply Voltage=5.5V, Min Operating Temperature=-40°C, Min Supply Voltage=2.97V, Operating Supply Current=8mA, Package Quantity=5000, Data Rate=12Mbps, Interface=UART, Lead Free="Lead Free", Mount="Surface Mount", Number of Channels=1, Number of Pins=20, Packaging="Tape and Reel", Weight=0.004339oz
U3: library part CMP-0395-00535-2, "Single Output Low Noise LDO, 1.5 A, Fixed 3.3 V Output, 2.1 to 20 V Input, 4-pin SOT-223 (DCY), -40 to 125 degC, Green (RoHS & no Sb/Br)", Manufacturer="Texas Instruments", Accuracy(%)=3, Code_JEDEC=TO-261, ComponentLink1Description="Manufacturer URL", ComponentLink1URL=http://www.ti.com/, ComponentLink2Description=Datasheet, ComponentLink2URL=http://www.ti.com/general/docs/lit/getliterature.tsp?genericPartNumber=TL1963A-33&fileType=pdf, ComponentLink3Description="Package Specification", ComponentLink3URL=http://www.ti.com/litv/pdf/mpds094a, DatasheetVersion=SLVS719F, Eco-Plan="Green (RoHS & no Sb/Br)", Fixed Output Options(V)=3.3, Iout(Max)(A)=1.5, Iq(Typ)(mA)=1, Mounting Technology="Surface Mount", PackageDescription="4-Pin Plastic Small Outline, Body 3.5 x 6.5 mm, Pitch 2.3 mm", PackageReference=DCY0004A, PackageVersion=4202506/B, PartNumber=TL1963A-33DCYR, SubFamily="Single Channel LDO", Vdo(Typ)(mV)=340, Vin(Max)(V)=20, Vin(Min)(V)=2.1, Vout Adj(Max)(V)=3.3, Vout Adj(Min)(V)=3.3

## Via types
v1: diameter 24, hole 12, L1 to L4, tented both sides, 171 vias

## Nets (pads, with @x,y where several pads share a name; then routed paths per layer and width w, separated by ;. In a path a pad name is that pad's centre, name@x,y a point inside that pad or via, vN(x,y) a via of type N, cw(c..) or ccw(c..) an arc to the next point about the centre after c; other vN are vias at no path point)
+3V3_FTDI: C4.1 C6.1 R7.2 R11.1 U2.10 U2.20 | length 727.9
  L1 w10.1: 610,684.57 625.56,700.12 625.56,707.9 628.28,710.63 U2.10@634.59,710.63 ; U2.20@785.41,789.37 796.62,789.37 799.25,792 C6.1@859.57,792 ; v1(833,834) 835.66,831.34 835.66,815.91 C6.1@859.57,792 ; C6.1@862.44,792 C6.1@859.57,792
  L1 w15: C4.1@548.56,626 C4.1@551.43,626 ; C4.1@566.08,640.65 C4.1@551.43,626 ; 576.33,650.9 610,684.57 ; R11.1@595,587.54 595,588.36 591.67,591.69 576.92,591.69 566.67,601.94 C4.1@566.67,626 ; v1(647.86,678) 620.76,650.9 577.51,650.9 566.67,640.06 C4.1@566.67,626 ; v1(833,834) 834.72,835.72 834.72,842.17 848.55,856 R7.2@849.54,856 ; C4.1@551.43,626 C4.1@566.67,626
  L4 w20: v1(647.86,678) 713.6,678 832.23,796.64 832.23,833.23 v1(833,834)
+3V3_REG: C8.2 C9.2 J6.1 U3.3 | length 1353.4
  L1 w15: C9.2@520,212.55 531.32,203.09 538.02,196.4 538.02,190.31 554,174.33 v1(554,173) ; v1(597,171) C8.2@597,203.09 ; C8.2@597,206 650.42,206 U3.3@656.97,199.45
  L1 w20: v1(511,172) 511.5,172.5 553.5,172.5 v1(554,173) 593.92,173 595.92,171 v1(597,171)
  L2 w40: v1@595,173 v1(597,171) 682.6,171 706.6,195 1202,195 1507,500 J6.1@1575,500
+5V: C7.1 C15.1 J1.22 J5.2 R1.1 U3.1 | length 1392.5
  L1 w15: J5.2@375,495 424.7,495 435.88,483.82 478.82,483.82 507.64,455 571.21,455 580,446.21 C7.1@580,394.81 580,394.45 581.8,392.64 596.55,392.64 609,380.19 656.61,380.19 U3.1@656.97,380.55 ; C15.1@585.56,829 585.56,895.56 J1.22@630,940 ; v1(701,497) 709,489 R1.1@738.54,489
  L4 w25: J5.2@375,495 448.75,495 ; J1.22@630,940 555.5,865.5 555.5,672.71 531.41,648.62 531.41,577.66 448.75,495 ; v1(701,497) 680.5,476.5 528.92,476.5 510.42,495 448.75,495
+5V_VBUS1: C3.1 D1.2 J3.A4-B9 J3.B4-A9 J5.1 R14.2 | length 1659.8
  L1 w6.03: R14.2@930.02,678.86 930.52,679.36 964.78,679.36 v1(965.28,679.86)
  L1 w15: J3.A4-B9@252.64,854.41 198.79,854.41 191.21,846.84 191.21,674.79 201,665 252.2,665 J3.B4-A9@252.64,665.43 317.46,665.43 332.4,650.5 386.5,650.5 427.79,609.21 427.79,596.79 412,581 411,581 J5.1@375,545 382,538 421,538 445,514 484,514 518,480 652,480 673,459 814,459 869.79,403.21 927.21,403.21 965.28,441.28 v1(965.28,679.86) ; D1.2@378.5,622 378.5,620 414.75,583.75 443.5,555 C3.1@483,555
+5V_VBUS2: C10.1 D6.2 J4.A4-B9 J4.B4-A9 J5.3 | length 730.2
  L1 w12: D6.2@351,348 351,362.63 368.37,380 397,380 C10.1@449.88,380
  L1 w15: J5.3@375,445 379.78,440.22 386.79,440.22 447.01,380 C10.1@449.88,380
  L1 w20: J4.B4-A9@252.64,145.59 189.72,145.59 178,157.31 178,322.85 189.72,334.57 J4.A4-B9@252.64,334.57 298.82,334.57 363.25,399 385.28,399 397,387.28 397,380
"+VCC FTDI": C1.1 C2.1 R1.2 R2.2 U2.12 | length 223.6
  L1 w6.03: C1.1@718.08,614.92 C1.1@733,600
  L1 w10.1: U2.12@690.04,663.11 686.68,659.75 686.68,659.19 686.68,650 686.68,629.46 701.26,614.87 718.03,614.87 C1.1@718.08,614.92
  L1 w15: C1.1@733,600 730.79,597.79 730.79,566.36 747.36,549.8 748.2,549.8 C2.1@750,548 750,524.92 767.85,507.08 767.85,492.33 771.17,489 R1.2@772,489
BTN_GPIO0: C16.1 Q2.3 R19.1 SW1.1 SW1.2 | length 836
  L1 w6.03: Q2.3@1404.76,764 1408.7,764 1465.02,707.68 SW1.2@1518.31,707.68 SW1.1@1681.69,707.68 1747.68,707.68 C16.1@1759,719 1799.16,719 1829.88,688.28 1977.47,688.28 1987,697.82 1987,744.18 2027.82,785 R19.1@2132.82,785
CHIP_PU: C17.1 J2.3 Q1.3 R20.1 SW2.1 SW2.2 U1.45 | length 2874.3
  L1 w6.03: Q1.3@1403.76,597 1407.7,597 1414.51,590.19 1414.51,341.44 1518.31,237.65 SW2.2@1518.31,207.68 SW2.1@1681.69,207.68 1689.57,207.68 1723.57,241.68 C17.1@1813,241.68 R20.1@1813,291.84 1779.51,291.84 1697.33,374.02 v1(1694,374.02) ; J2.3@2530,60 2576,14 2749.05,14 2778.66,43.61 U1.45@2778.66,204.41
  L4 w6.03: v1(1694,374.02) 1949.02,374.02 2009,434 2087,434 2128,393 2209.18,393 2222.18,380 2233.18,369 2489.44,369 2514.85,343.59 2716.28,343.59 2738.73,321.14 2738.73,237.08 2587.65,86 2569.05,86 2543.05,60 J2.3@2530,60
CON1_USB_N: D4.2 J3.A7 J3.B7 R8.1 | length 436.6
  L1 w6.03: J3.A7@252.64,750.08 279.35,750.08 286.59,757.32 286.59,789.45 ; J3.B7@252.64,789.45 286.59,789.45 ; D4.2@360.5,771 339,771 320.55,789.45 286.59,789.45 ; D4.2@361,771.5 361,762.69 v1(377.46,746.23) ; v1(508,715) R8.1@531.82,715
  L1 w6.23: D4.2@360.5,771 D4.2@361,771.5
  L4 w6.03: v1(377.46,746.23) 377.46,749.3 368.01,758.75 368.01,769.47 371.55,773 424,773 464.01,732.99 494.8,732.99 508,719.78 v1(508,715)
CON1_USB_P: D5.2 J3.A6 J3.B6 R9.1 | length 486.5
  L1 w6.03: J3.B6@252.64,730.39 328.61,730.39 339,720 360.5,720 D5.2@361,720.5 361,729.31 v1(344.54,745.77) ; v1(508,765) R9.1@531.82,765
  L1 w6.23: J3.B6@252.64,730.39 251.33,731.7 224.65,731.7 218.89,737.47 218.89,762.69 224.65,768.45 251.33,768.45 J3.A6@252.64,769.76
  L4 w6.03: v1(344.54,745.77) 344.54,748.84 353.99,758.29 353.99,775.28 365.74,787.03 429.81,787.03 469.83,747.01 494.8,747.01 508,760.22 v1(508,765)
CON2_USB_N: D7.2 J4.A7 J4.B7 R23.1 | length 2242.5
  L1 w6.03: J4.A7@252.64,230.24 251.47,231.41 224.53,231.41 218.99,236.95 218.99,262.89 224.53,268.44 251.47,268.44 J4.B7@252.64,269.61 308.58,269.61 317.68,260.5 D7.2@359,260.5 364,260.5 366.99,257.51 366.99,240.64 370.52,237.11 387.48,237.11 396.47,246.09 v1(400,246.09) ; v1(1927.27,549.27) 1930.67,549.27 1939.79,540.15 1953.45,540.15 1967,526.6 1967,500.01 1997,470.01 2116,470.01 2121.54,475.55 R23.1@2121.54,496
  L4 w6.03: v1(400,246.09) 403.44,242.66 403.44,237.2 403.53,237.11 437.89,237.11 453,222 1044.29,222 1088.39,266.1 1211.26,266.1 1235.16,290 1383.38,290 1397.49,304.1 1483.1,304.1 1543.03,364.03 1582,364.03 1657.09,439.12 1847.09,439.12 1853.97,446 1853.97,471.66 1888.8,506.49 1888.8,528.4 1900.55,540.15 1914.76,540.15 1923.88,549.27 v1(1927.27,549.27)
CON2_USB_P: D8.2 J4.A6 J4.B6 R24.1 | length 2223.3
  L1 w6.03: J4.B6@252.64,210.55 287,210.55 304.45,210.55 325.5,189.5 D8.2@359,189.5 364,189.5 366.99,192.49 366.99,214.45 375.61,223.08 387.48,223.08 396.47,214.09 v1(400,214.09) ; J4.A6@252.64,249.92 255.4,247.16 279.84,247.16 287,239.99 287,211 ; v1(1927,517) 1930.4,517 1939.52,526.12 1947.64,526.12 1952.97,520.79 1952.97,494.2 1991.19,455.99 2116,455.99 2121.54,450.45 R24.1@2121.54,430
  L4 w6.03: v1(400,214.09) 403.44,217.53 403.44,222.99 403.53,223.08 432.08,223.08 447.19,207.97 1050.1,207.97 1094.2,252.08 1217.08,252.08 1240.97,275.97 1389.19,275.97 1403.3,290.08 1488.92,290.08 1548.84,350 1587.81,350 1662.9,425.09 1852.9,425.09 1868,440.19 1868,465.85 1902.83,500.68 1902.83,522.59 1906.36,526.12 1914.48,526.12 1923.6,517 v1(1927,517)
CON_ESP_USB_N: J2.21 R25.1 | length 1781.4
  L1 w6.03: J2.21@730,60 769.45,60 772.99,63.53 772.99,133.98 767.44,139.53 767.44,148.56 v1(764,152) ; R25.1@2188.46,496 v1(2217,496)
  L4 w6.03: v1(764,152) 764,153.43 775.09,164.52 775.09,175.5 790.6,191 1052.97,191 1100.01,238.05 1258.2,238.05 1277.2,257.05 1390.11,257.05 1409.11,276.05 1504.27,276.05 1558.41,330.19 1598.37,330.19 1655.66,387.48 1655.66,388.07 1678.66,411.06 1872.22,411.06 1931.17,470.01 2213.47,470.01 2217,473.55 v1(2217,496)
CON_ESP_USB_P: J2.20 R26.1 | length 1761.3
  L1 w6.03: v1(800.21,151.01) 800.21,147.65 787.01,134.45 787.01,63.53 790.55,60 J2.20@830,60 ; R26.1@2189.46,431 R26.1@2188.46,430 v1(2217,430)
  L4 w6.03: v1(800.21,151.01) 800.21,152.44 789.12,163.53 789.12,169.68 796.41,176.97 1058.78,176.97 1105.83,224.01 1264.01,224.01 1283.01,243.01 1395.92,243.01 1414.92,262.01 1510.08,262.01 1564.22,316.16 1604.19,316.16 1669.69,381.66 1669.69,382.26 1684.47,397.03 1878.03,397.03 1936.99,455.99 2213.47,455.99 2217,452.45 v1(2217,430)
CON_GPIO0: J1.3 R18.1 | length 482
  L1 w6.03: R18.1@2132.82,837 2132.82,862.97 2141.86,872 2508,872 2530,894 J1.3@2530,940
DTR_FTDI: Q2.2 R4.2 U2.18 | length 648
  L1 w6.03: U2.18@785.41,750 785.64,749.77 805.91,749.77 806,749.68 812.54,749.68 825.15,737.08 964.85,737.08 989.78,762 1016.18,762 1095,683.18 1095,657.02 1100.86,651.16 R4.2@1169,651.16 1245.86,651.16 1321.3,726.6 Q2.2@1325.24,726.6
ESP_USB_N: R23.2 R25.2 U1.23 | length 137.3
  L1 w6.03: R23.2@2155,496 2155.98,496 2163.8,488.19 2163.8,473.55 2167.33,470.01 2217.38,470.01 2217.64,470.28 2236.28,470.28 2246,480 U1.23@2268.82,480
ESP_USB_P: R24.2 R26.2 U1.24 | length 137.3
  L1 w6.03: R24.2@2155,430 2155.98,430 2163.8,437.81 2163.8,452.45 2167.33,455.99 2223.19,455.99 2223.46,456.25 2235.75,456.25 2245.46,446.54 U1.24@2268.82,446.54
FTDI_RESET: C5.1 R11.2 U2.11 | length 129.6
  L1 w6.03: R11.2@595,621 635.56,621 C5.1@646,610.56 660.92,625.48 660.92,653.58 670.63,663.28 U2.11@670.63,674.59
FTDI_USB_N: R8.2 U2.9 | length 75.7
  L1 w6.03: R8.2@572.18,715 578.41,721.24 578.41,729.24 582.06,732.89 602.93,732.89 603.09,733.04 619.21,733.04 621.93,730.32 U2.9@634.59,730.32
FTDI_USB_P: R9.2 U2.8 | length 75.7
  L1 w6.03: R9.2@572.18,765 578.41,758.76 578.41,750.76 582.06,747.11 597.04,747.11 597.19,747.27 619.21,747.27 621.93,750 U2.8@634.59,750